# Altium PCB PCB_Hall_15mm_3_0.PcbDoc
Units mm, origin at the board's own origin, x right, y up, seen from the top; angles counter-clockwise.
Board outline 29.25 x 60.24 mm, 4 copper layers (Top Layer, Signal Layer 1, Signal Layer 2, Bottom Layer), stack 0.778 mm thick; 11 components, 15 nets, 67 pads, 21 vias.
Unrouted connection lines stored in the file: 13.
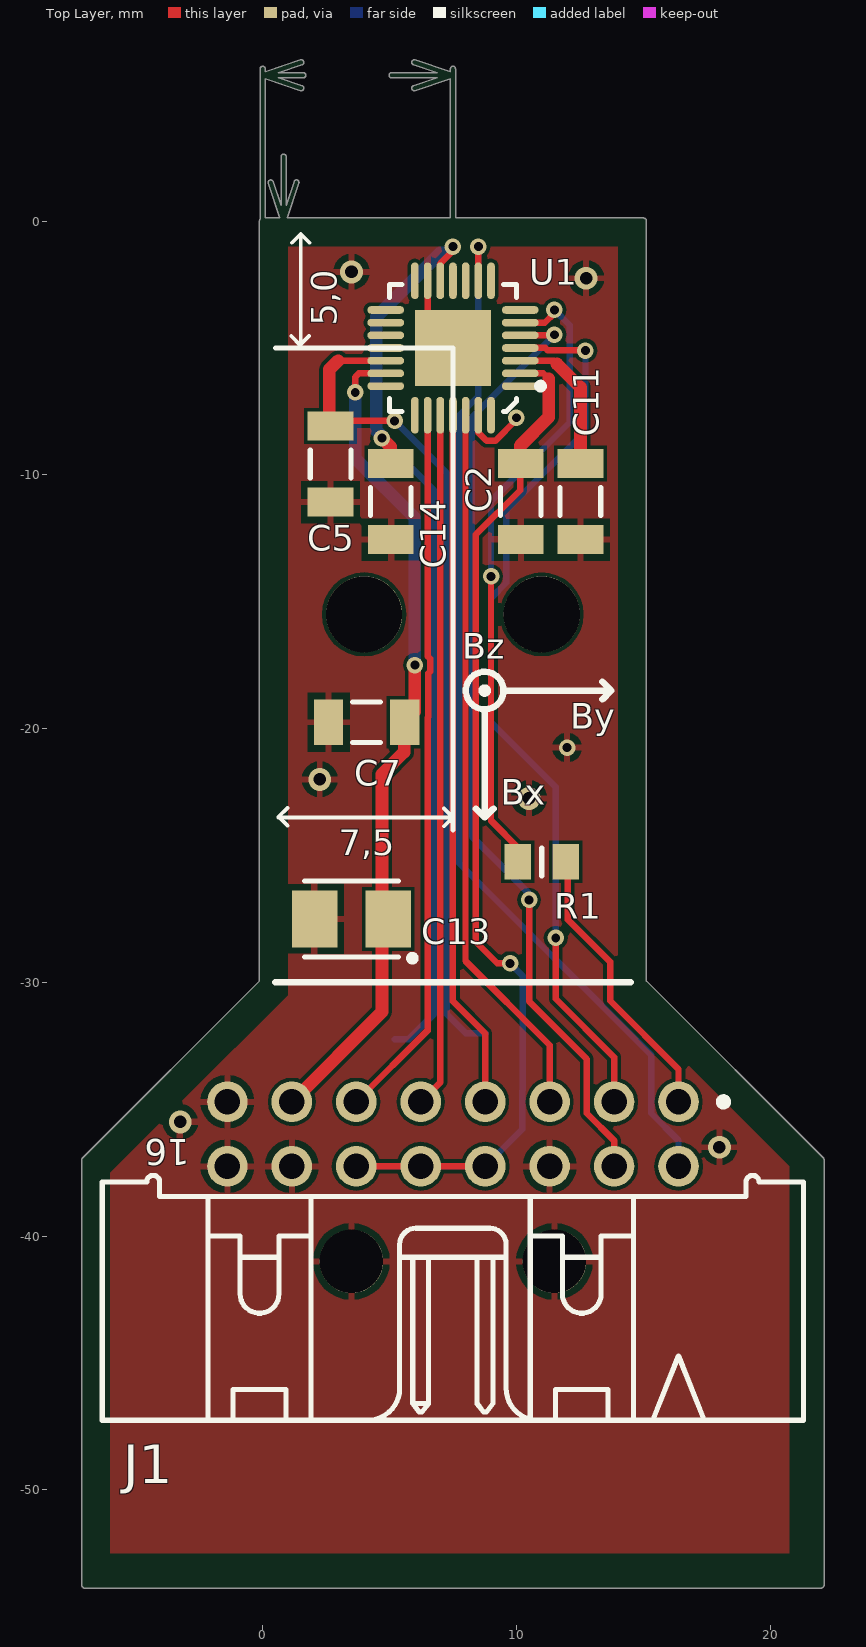
[diagram p0: Top Layer view]
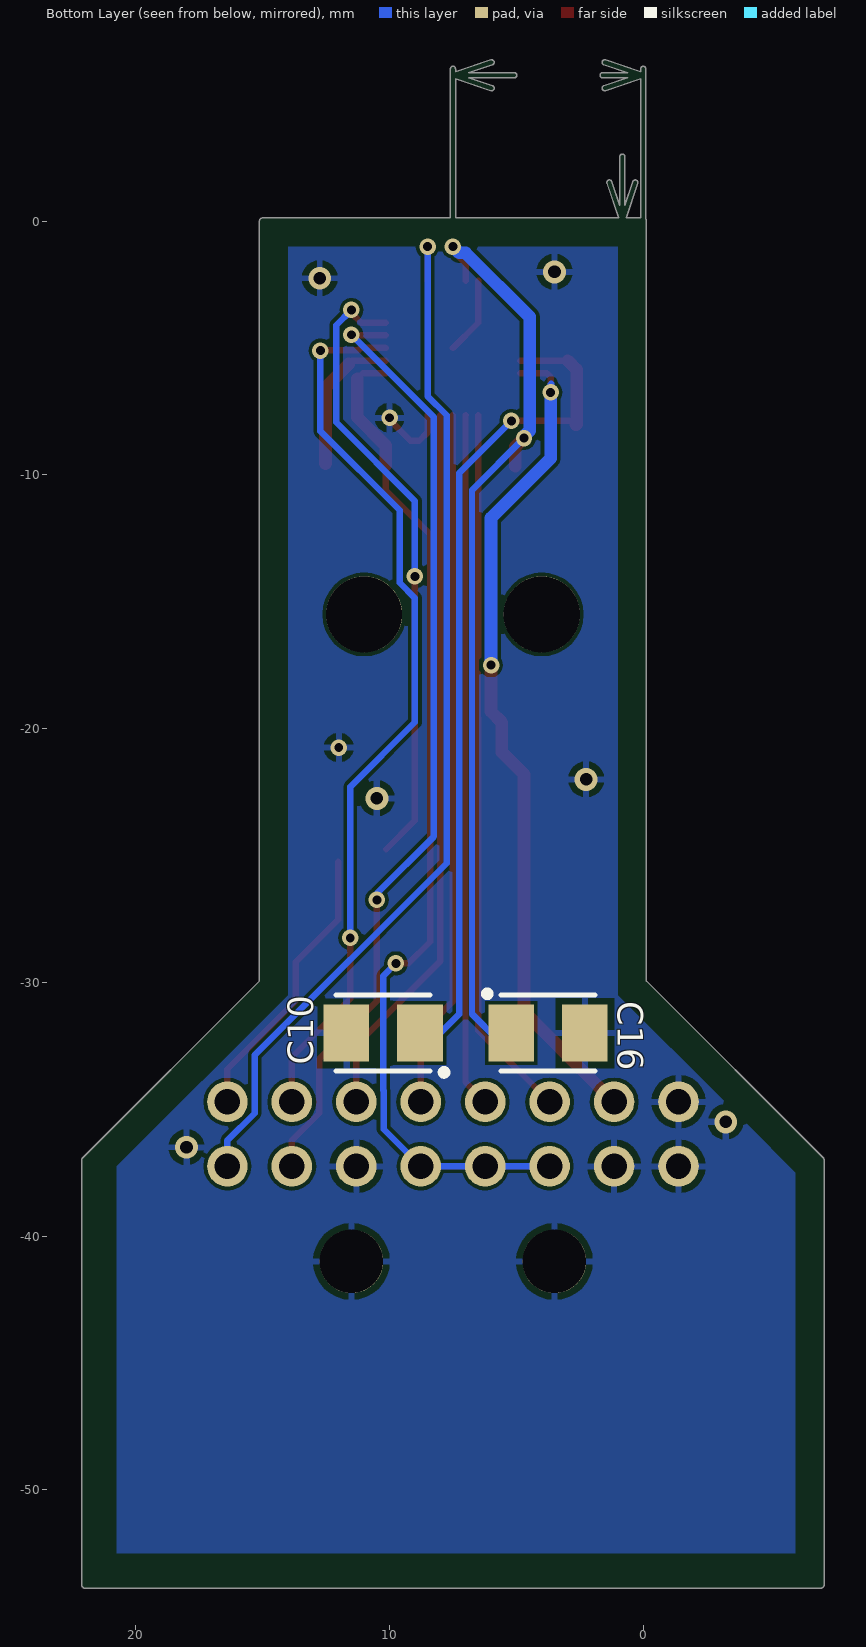
[diagram p1: Bottom Layer view, seen from below]
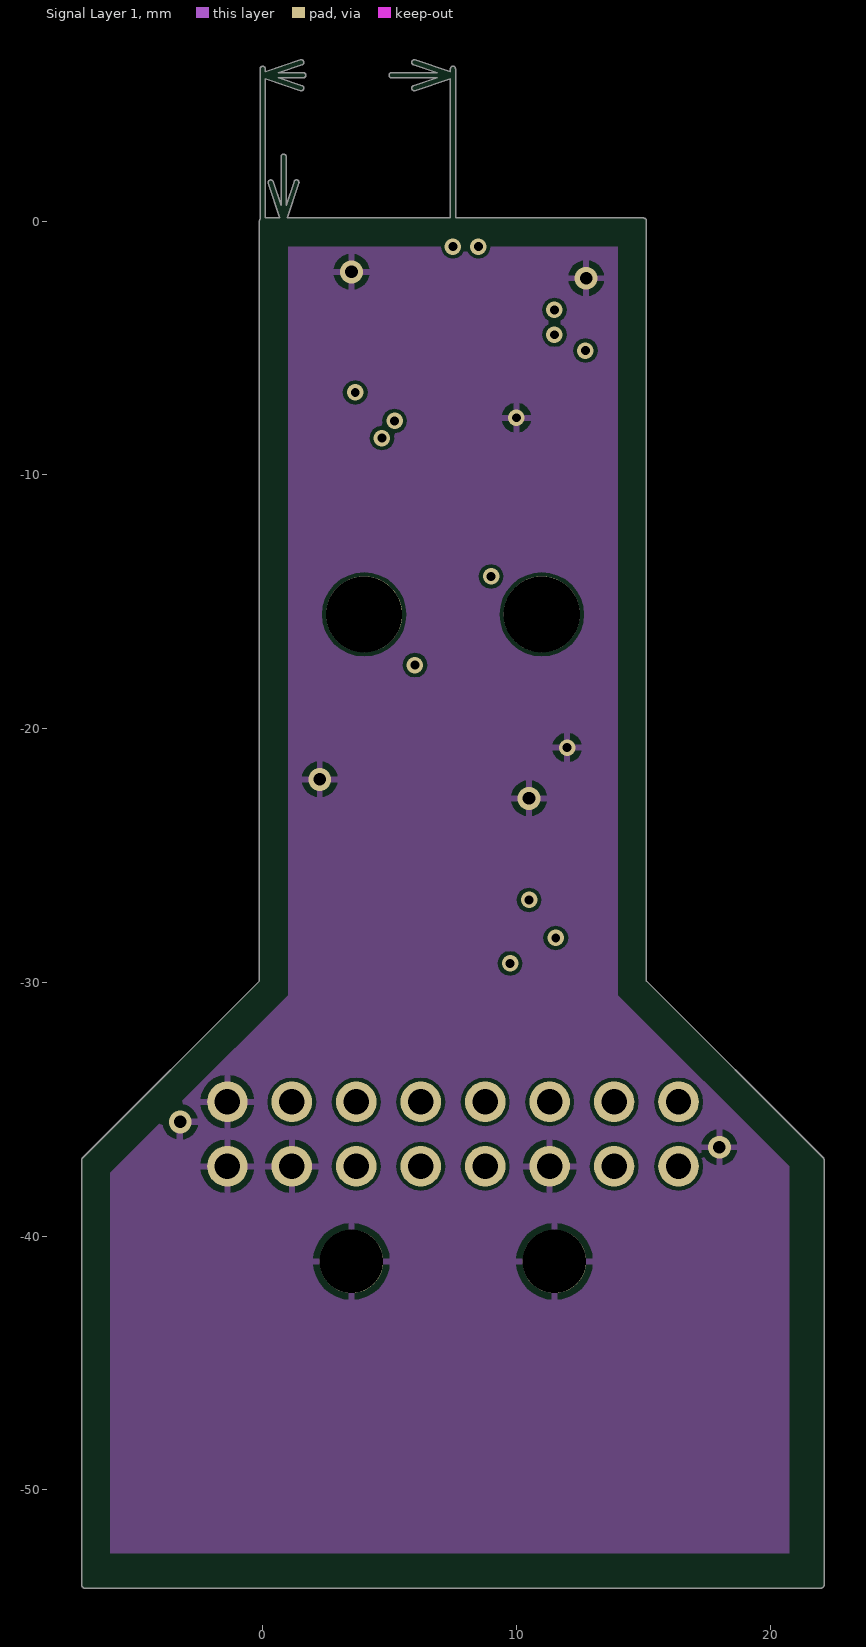
[diagram p2: Signal Layer 1]
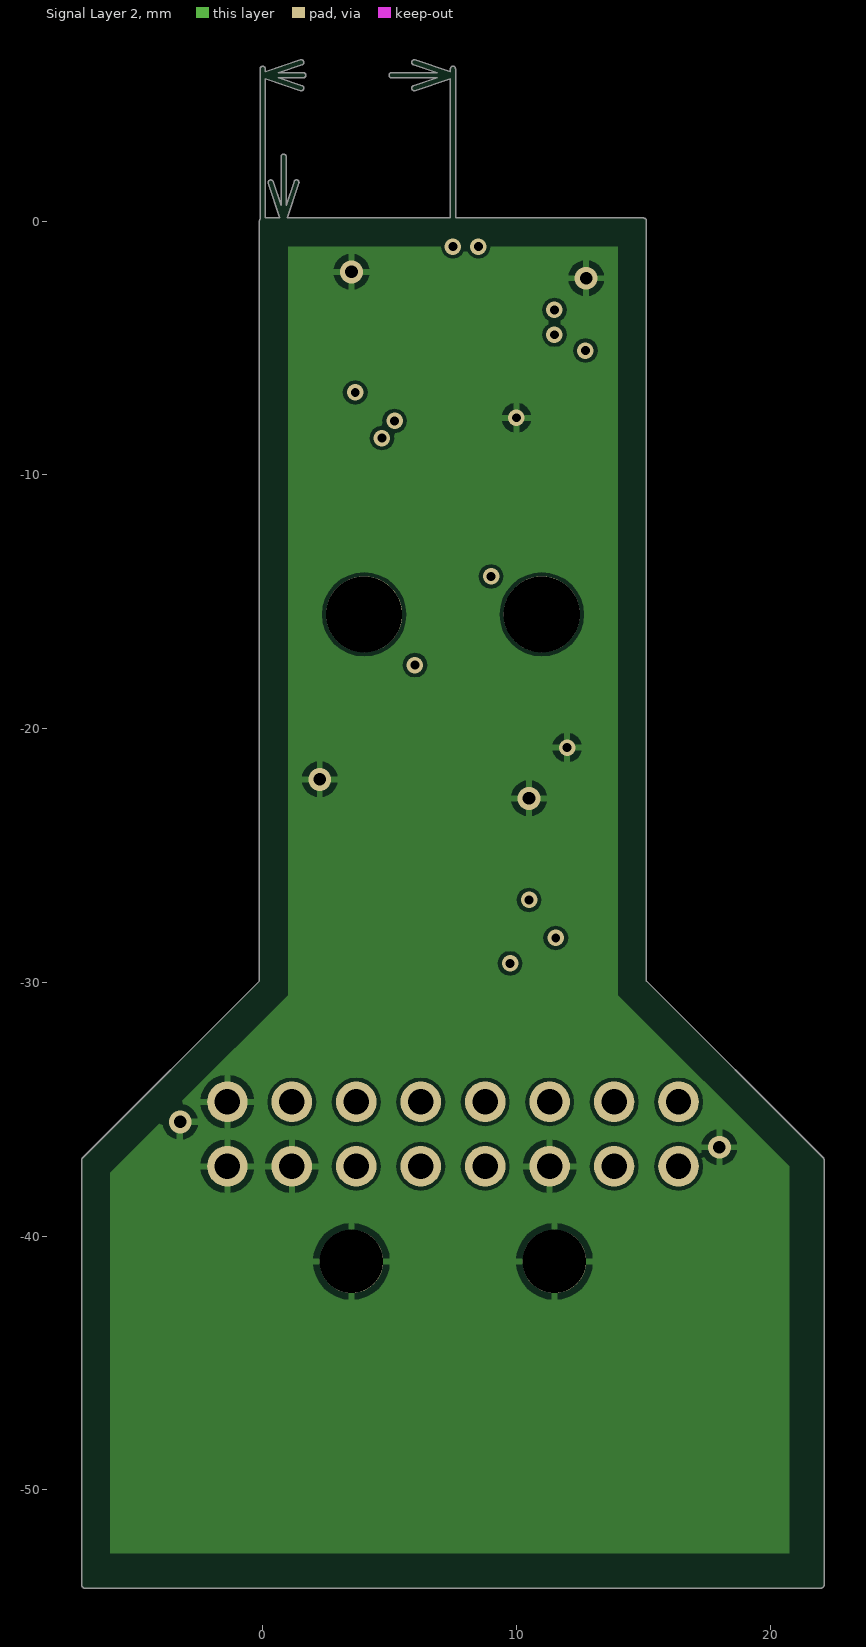
[diagram p3: Signal Layer 2]
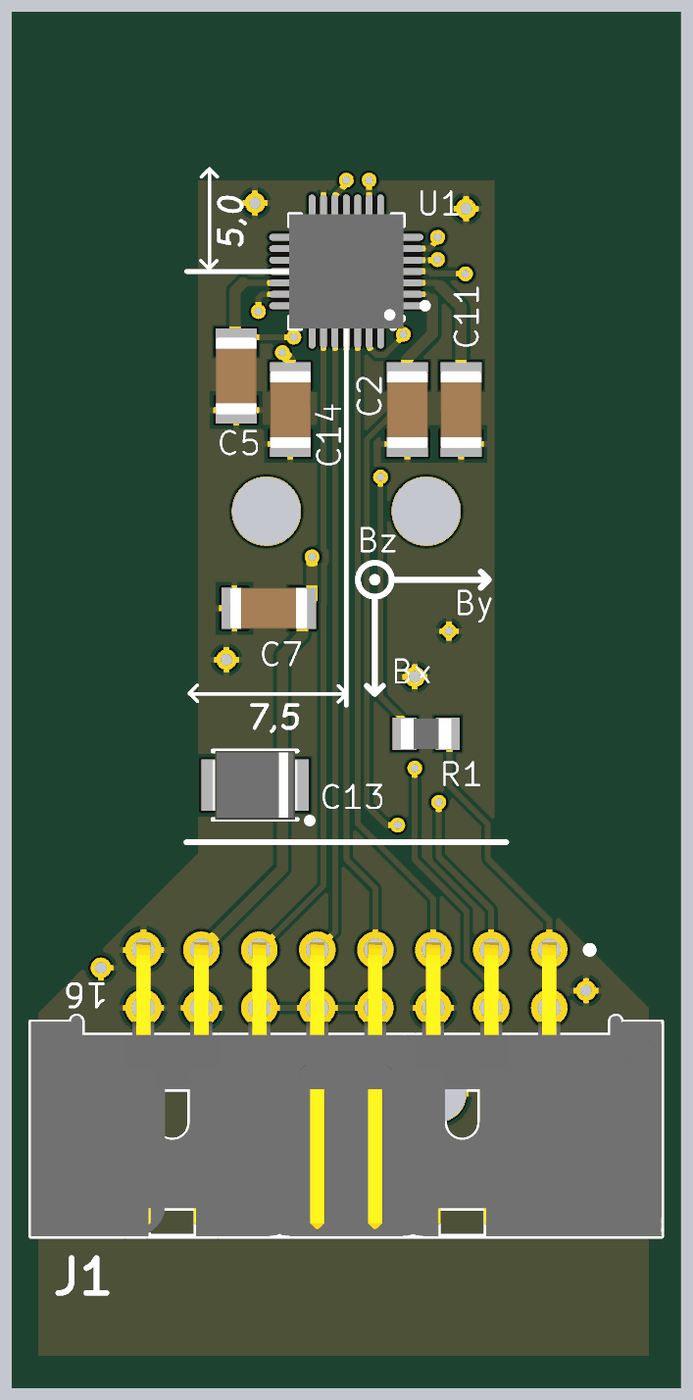
[diagram p4: 3D render of the assembled board from above, using the file's embedded part models]

## Layer stack, top to bottom
Top Solder: solder mask 0.0102, Solder Resist, Dk 3.5
Top Layer: signal copper 0.0356
Dielectric 1: core 0.254, FR-4, Dk 4.2
Signal Layer 1: signal copper 0.036
Dielectric 3: prepreg 0.127, Dk 4.2
Signal Layer 2: signal copper 0.036
Dielectric 2: core 0.254, Dk 4.2
Bottom Layer: signal copper 0.0356
Bottom Solder: solder mask 0.0102, Solder Resist, Dk 3.5

## Board outline
-7.127,-37 cw(c-7,-37) -7.09,-36.909 -7.09,-36.91 -0.127,-29.947 -0.127,0 cw(c0,0) -0.1,0.078 -0.1,6.004 cw(c0,6.004) 0.1,6.004 0.1,5.889 1.492,6.353 cw(c1.524,6.258) 1.624,6.258 cw(c1.524,6.258) 1.556,6.163 0.619,5.85 1.604,5.85 cw(c1.604,5.75) 1.705,5.75 cw(c1.604,5.75) 1.604,5.65 0.619,5.65 1.556,5.337 cw(c1.524,5.242) 1.624,5.242 cw(c1.524,5.242) 1.492,5.147 0.1,5.611 0.1,0.127 0.677,0.127 0.222,1.492 cw(c0.317,1.524) 0.412,1.556 0.725,0.619 0.725,2.54 cw(c0.825,2.54) 0.925,2.54 0.925,0.619 1.238,1.556 cw(c1.333,1.524) 1.433,1.524 cw(c1.333,1.524) 1.428,1.492 0.973,0.127 7.4,0.127 7.4,5.611 6.008,5.147 cw(c5.976,5.242) 5.944,5.337 6.881,5.65 5.083,5.65 cw(c5.083,5.75) 5.083,5.85 6.881,5.85 5.944,6.163 cw(c5.976,6.258) 6.008,6.353 7.4,5.889 7.4,6.004 cw(c7.5,6.004) 7.6,6.004 7.6,0.127 15,0.127 cw(c15,0) 15.127,0 cw(c15,0) 15.127,-0.002 15.127,-29.947 22.09,-36.91 22.09,-36.909 cw(c22,-37) 22.127,-37 22.127,-53.75 cw(c22,-53.75) 22,-53.877 -7,-53.877 cw(c-7,-53.75) -7.127,-53.75

## Design rules (kind name [scope] priority, off if disabled: settings)
Clearance [All] p1: gap=0.15 ignorepadtopadclearanceinfootprint=FALSE except(0: Arc-Text Track-Text SMDPad-Text THPad-Text Via-Text Fill-Text Poly-Text Region-Text Text-Text)
HoleSize [All] p1: absolutevalues=TRUE maxlimit=20 minlimit=0.3 maxpercent=80.000 minpercent=20.000
MinimumSolderMaskSliver [All] p1 off: minsoldermaskwidth=0.254
PasteMaskExpansion [All] p1 off: expansion=0
PolygonConnect [All] p1: connectstyle=Relief reliefconductorwidth=0.254 reliefentries=4 polygonreliefangle="90 Angle" airgapwidth=0.254
RoutingCorners [All] p1: cornerstyle=45-Degree minsetback=0.5 maxsetback=2.54
RoutingTopology [InNetClass('All Nets')] p1: topology=Shortest
RoutingVias [All] p1: holewidth=0.35 width=0.55 viastyle="Through Hole" minholewidth=0.3 minwidth=0.45 maxholewidth=0.711 maxwidth=1.27
SilkToSilkClearance [All] p1 off: silktosilkclearance=0.254
SilkToSolderMaskClearance [IsPad] p1 off: minsilkscreentomaskgap=0.254 clearancetoexposedcopper=TRUE
SolderMaskExpansion [All] p1 off: expansion=0.102
UnRoutedNet [All] p1: checkbadconnections=TRUE
Width [All] p1: maxlimit=0.5 minlimit=0.15 preferedwidth=0.254 toplayer_prefwidth=0.2 midlayer1_minwidth=0.254 midlayer2_minwidth=0.254 midlayer2_maxwidth=0.254 bottomlayer_prefwidth=0.2 minimp=50.000000 maximp=50.000000 favimp=50.000000
22 further rules are at their usual default settings.

## Components (designator, comment, footprint, x,y, rotation, side; value= is the part's Value field where it differs from the comment)
C2 "0.1" CAPC3216X100N 10.175,-11.05 r90 top
C5 "0.1" CAPC3216X100N 2.675,-9.575 r270 top
C7 "0.1" CAPC3216X100N 4.1,-19.75 r180 top
C10 "=Value" CAPMP3528X120N 10.25,-32 r0 bottom
C11 "0.1" CAPC3216X100N 12.525,-11.05 r90 top
C13 "=Value" CAPMP3528X120N 3.5,-27.5 r180 top
C14 "0.1" CAPC3216X100N 5.05,-11.05 r90 top
C16 "=Value" CAPMP3528X120N 3.75,-32 r180 bottom
J1 "=Family" 3M_N2516-5002RB 7.5,-35.98 r180 top
R1 "1k" RESC2012X70N 11,-25.25 r0 top
U1 "Hall sensor" QFN50P500X500X100-29N-S325 7.5,-5 r180 top

## Footprints (in the part's own frame and the unit in brackets; to place one, negate y for a bottom-side part, rotate by r counter-clockwise, add the part's x,y. Pads: shape width x height; smd on the part's side, far side on the other; paste and mask are expansions set on the pad)
3M_N2516-5002RB [mm] "16 Contacts - Right Angle .100\" x .100\" Low Profile Four-Wall Header"
  round 1.6 hole 1: 1(-8.89,-1.27) 2(-8.89,1.27) 3(-6.35,-1.27) 4(-6.35,1.27) 5(-3.81,-1.27) 6(-3.81,1.27) 7(-1.27,-1.27) 8(-1.27,1.27) 9(1.27,-1.27) 10(1.27,1.27) 11(3.81,-1.27) 12(3.81,1.27) 13(6.35,-1.27) 14(6.35,1.27) 15(8.89,-1.27) 16(8.89,1.27)
  silkscreen extent -13.81,-1.42 13.82,11.28, body extent -13.81,-1.59 13.82,11.27, height 8.64
CAPC3216X100N [mm] "Chip Capacitor, Body 3.2x1.6mm, IPC Medium Density"
  rect 1.15x1.8 smd: 1(-1.5,0) 2(1.5,0)
  silkscreen extent -0.55,-0.8 0.55,0.8, body extent -1.7,-0.9 1.7,0.9, height 0.94
CAPMP3528X120N [mm] "Capacitor, Polarized, Molded  Body 3.5x2.8mm, IPC Medium Density"
  rect 1.8x2.25 smd: 1(-1.45,0) 2(1.45,0)
  silkscreen extent -2.52,-1.5 1.85,1.67, body extent -1.85,-1.5 1.85,1.5, height 1.2
QFN50P500X500X100-29N-S325 [mm] "QFN, 0.50mm Pitch, Square; 28 pin, 5.00mm L X 5.00mm W X 1.00mm H body (w/thermal tab 3.25 X 3.25mm),  IPC Medium Density"
  oval 1.45x0.3 smd: 1(-2.65,1.5) 2(-2.65,1) 3(-2.65,0.5) 4(-2.65,0) 5(-2.65,-0.5) 6(-2.65,-1) 7(-2.65,-1.5) 15(2.65,-1.5) 16(2.65,-1) 17(2.65,-0.5) 18(2.65,0) 19(2.65,0.5) 20(2.65,1) 21(2.65,1.5)
  oval 0.3x1.45 smd: 8(-1.5,-2.65) 9(-1,-2.65) 10(-0.5,-2.65) 11(0,-2.65) 12(0.5,-2.65) 13(1,-2.65) 14(1.5,-2.65) 22(1.5,2.65) 23(1,2.65) 24(0.5,2.65) 25(0,2.65) 26(-0.5,2.65) 27(-1,2.65) 28(-1.5,2.65)
  rect 3x3 smd: 29(0,0)
  silkscreen extent -3.58,-2.5 2.5,2.5, body extent -2.5,-2.5 2.5,2.5, height 1
RESC2012X70N [mm] "Chip Resistor, EIA 0805, Metric 2012, Body 2.0x1.25mm, IPC Medium Density"
  rect 1.05x1.4 smd: 1(-0.95,0) 2(0.95,0)
  silkscreen extent 0,-0.55 0,0.55, body extent -1.1,-0.67 1.1,0.68, height 0.7

## Part data
C2 C5 C7 C11 C14: library part "Capacitor1206 - non polarized", "Non-polarised1206 capacitor", Dielectric type=X5R, SMD Solders=2, SolderOption=0, THD Solders=0, Vendor=any
C10 C13 C16: library part "Capacitor - polarized", "Polarised capacitor", SMD Solders=2, SolderOption=0, THD Solders=0
J1: library part "Connector 16", "Connector 16", SMD Solders=0, Solder Option=0, THD Solders=16
R1: library part "Resistor - 5%", "Resistor - 5%", Tolerance=5%, SMD Solders=2, SolderOption=0, THD Solders=0, TK=1000ppmC^(-1), Vendor=any
U1: "SENM3Dx Vertical Hall Sensor"

## Free pads (board coordinates)
  round 3 hole 3: 1(4,-15.5) 2(11,-15.5)
  round 2.5 hole 2.5: 3(3.5,-41) 4(11.5,-41)

## Via types
v1: diameter 0.65, hole 0.35, Top Layer to Bottom Layer, 15 vias
v2: diameter 0.9, hole 0.5, Top Layer to Bottom Layer, 6 vias

## Nets (pads, with @x,y where several pads share a name; then routed paths per layer and width w, separated by ;. In a path a pad name is that pad's centre, name@x,y a point inside that pad or via, vN(x,y) a via of type N, cw(c..) or ccw(c..) an arc to the next point about the centre after c; other vN are vias at no path point)
"5V Hall": C7.1 C13.1 J1.13 U1.20 | length 33.2
  Top Layer w0.254: v1(3.65,-6.75) 3.65,-6.145 3.795,-6 U1.20
  Top Layer w0.5: J1.13 4.7,-31.16 4.7,-27.5 4.7,-21.8 5.575,-20.925 5.575,-19.75 6,-19.325 v1(6,-17.5)
  Bottom Layer w0.254: 3.625,-6.4 3.65,-6.425 v1(3.65,-6.75)
  Bottom Layer w0.5: v1(3.65,-6.75) 3.65,-9.35 6,-11.7 v1(6,-17.5)
CS1: J1.2 U1.9 | length 41.5
  Top Layer w0.254: U1.9 8.5,-1.5 ; 8.5,-1.45 v1(8.5,-1)
  Bottom Layer w0.254: v1@8.5,-0.9 v1(8.5,-1) 8.5,-6.904 7.75,-7.654 7.75,-25.301 15.313,-32.864 15.313,-35.156 16.39,-36.233 J1.2
GND: C2.1 C5.2 C7.2 C10.2 C11.1 C13.2 C14.1 C16.2 J1.6 J1.14 J1.15 J1.16 pad.3 pad.4 U1.13 U1.27 U1.29 | length 5.8
  Top Layer w0.254: U1.13 6.5,-4 U1.29 ; U1.27 8.5,-8.329 8.823,-8.652 9.177,-8.652 10,-7.829 v1(10,-7.75)
  other v1: 12,-20.75
  other v2: 18,-36.5 -3.25,-35.5 10.5,-22.75 2.25,-22 12.75,-2.25 3.5,-2
MCLK: J1.3 U1.4 | length 35.8
  Top Layer w0.254: U1.4 10.162,-4.988 11.137,-4.988 11.245,-5.096 12.717,-5.096 v1(12.723,-5.102) v1@12.748,-5.102 ; v1(11.55,-28.25) 11.55,-30.65 13.85,-32.95 J1.3
  Bottom Layer w0.254: v1(11.55,-28.25) 11.55,-22.3 9,-19.75 9,-14.851 9.602,-14.249 9.602,-11.398 12.723,-8.277 v1(12.723,-5.102)
MISO: R1.1 U1.6 | length 24.9
  Top Layer w0.254: v1(9,-14) 9,-23.625 R1.1@10.125,-24.75 ; U1.6 11.117,-4 11.5,-3.617 v1(11.5,-3.5)
  Bottom Layer w0.254: v1(9,-14) 9,-11.029 12.103,-7.927 12.103,-4.103 v1(11.5,-3.5)
MOSI: J1.4 U1.5 | length 37.8
  Top Layer w0.254: U1.5 11.476,-4.5 v1(11.501,-4.475) ; v1(10.5,-26.75) 10.5,-30.75 12.773,-33.023 12.773,-35.156 13.85,-36.233 J1.4
  Bottom Layer w0.254: v1(10.5,-26.75) 10.5,-26.5 8.25,-24.25 8.25,-7.726 v1(11.501,-4.475)
NetC5_1: C5.1 C10.1 U1.19 | length 33.5
  Top Layer w0.254: C5.1 2.875,-7.875 v1(5.2,-7.875) ; 2.973,-5.5 U1.19
  Top Layer w0.5: C5.1@2.65,-8.025 2.625,-8 2.625,-5.848 2.973,-5.5
  Bottom Layer w0.254: C10.1 8,-32 7.25,-31.25 7.25,-9.925 v1@5.35,-8.025 ; v1@5.35,-8.025 v1(5.2,-7.875) 5.2,-7.85 5.35,-8 v1@5.35,-8.025
NetC11_2: C11.2 U1.3 | length 5.8
  Top Layer w0.2: 11.475,-5.5 11.604,-5.629
  Top Layer w0.254: U1.3 11.475,-5.5
  Top Layer w0.5: 11.604,-5.629 12.525,-6.55 C11.2
NetC14_2: C14.2 C16.1 U1.12 | length 37.5
  Top Layer w0.254: v1@4.7,-8.675 v1(4.7,-8.55) ; U1.12 7,-1.671 7.5,-1.171 v1(7.5,-1)
  Top Layer w0.5: v1(4.7,-8.55) 5.05,-8.9 C14.2 C14.2@5.05,-9.65
  Bottom Layer w0.254: v1(4.7,-8.55) 6.75,-10.6 6.75,-31.25 5.75,-32.25 C16.1@5.2,-32.25
  Bottom Layer w0.5: v1(4.7,-8.55) 4.7,-8.476 4.475,-8.25 4.475,-3.775 7,-1.25 7.25,-1.25 v1(7.5,-1)
NetJ1_1: J1.1 R1.2 | length 11.3
  Top Layer w0.254: R1.2@12.025,-25.25 12.025,-27.525 13.695,-29.195 13.695,-30.73 16.39,-33.425 J1.1
V1temp: J1.5 U1.26 | length 28.4
  Top Layer w0.254: U1.26 7.994,-7.656 7.994,-29.159 11.31,-32.475 J1.5
V1x: J1.9 U1.24 | length 27.4
  Top Layer w0.254: J1.9 7.006,-33.934 7.006,-7.656 U1.24
V1y: J1.11 U1.23 | length 28.3
  Top Layer w0.254: J1.11 6.5,-31.9 6.5,-19.57 6.527,-19.543 6.527,-17.824 6.602,-17.749 6.602,-17.251 6.5,-17.149 U1.23
V1z: J1.7 U1.25 | length 27.6
  Top Layer w0.254: U1.25 7.5,-30.73 7.5,-30.75 8.77,-32.02 J1.7
Vref1: C2.2 J1.8 J1.10 J1.12 U1.2 | length 45.3
  Top Layer w0.254: J1.12 J1.10 J1.8 ; v1(9.75,-29.25) 9.25,-29.25 8.398,-28.398 8.398,-12.352 10.15,-10.6 C2.2@10.15,-9.625 ; U1.2 11.056,-6 11.275,-6.219
  Top Layer w0.5: C2.2@10.15,-9.625 10.15,-8.85 11.275,-7.725 11.275,-6.219
  Bottom Layer w0.254: J1.12 J1.10 J1.8 10.233,-35.787 10.233,-34.264 10.25,-34.247 10.25,-29.75 v1(9.75,-29.25)
pads on no net: U1.1 U1.7 U1.8 U1.10 U1.11 U1.14 U1.15 U1.16 U1.17 U1.18 U1.21 U1.22 U1.28

## Polygon pours and split planes (outlines as drawn)
GND on Bottom Layer "Bottom Layer-GND" (solid, pour order 14): 1,-1 14,-1 14,-30.5 20.75,-37.25 20.75,-52.5 -6,-52.5 -6,-37.5 1,-30.5
GND on Bottom Layer "Bottom Layer-GND 1" (solid, pour order 12): 1,-1 14,-1 14,-30.5 20.75,-37.25 20.75,-52.5 -6,-52.5 -6,-37.5 1,-30.5
GND on Signal Layer 1 "Signal Layer 1-GND" (solid, pour order 18): 1,-1 14,-1 14,-30.5 20.75,-37.25 20.75,-52.5 -6,-52.5 -6,-37.5 1,-30.5
GND on Signal Layer 2 "Signal Layer 2-GND" (solid, pour order 20): 1,-1 14,-1 14,-30.5 20.75,-37.25 20.75,-52.5 -6,-52.5 -6,-37.5 1,-30.5
GND on Top Layer "Top Layer-GND" (solid, pour order 16): 1,-1 14,-1 14,-30.5 20.75,-37.25 20.75,-52.5 -6,-52.5 -6,-37.5 1,-30.5

## Silkscreen, mask and mechanical layers (free items; w line width, h text height)
Top Overlay:
  circle w0.254: c8.75,-18.5 r0.12
  circle w0.254: c8.75,-18.5 r0.74
  lines w0.15: 0.625,-23.5 7.5,-23.5 ; 0.975,-23.825 0.625,-23.475 0.975,-23.125 ; 1.125,-4.525 1.475,-4.875 ; 1.15,-0.85 1.5,-0.5 ; 1.825,-4.525 1.475,-4.875 ; 1.85,-0.85 1.5,-0.5 ; 7.15,-23.85 7.5,-23.5 ; 7.15,-23.15 7.5,-23.5 ; 9.5,-18.5 11.275,-18.5 ; 1.475,-4.875 1.5,-4.875 1.5,-0.5
  lines w0.2: 0.5,-5 7.5,-5 7.5,-24
  lines w0.254: 0.5,-30 14.5,-30 ; 8.4,-23.15 8.75,-23.5 ; 8.75,-19.25 8.75,-23.5 ; 9.1,-23.15 8.75,-23.5 ; 9.49,-18.5 13.74,-18.5 ; 13.39,-18.85 13.74,-18.5 ; 13.39,-18.15 13.74,-18.5
  text "5,0" at 2.925,-4.125 h1 r90
  text "Bz" at 7.875,-17.25 h1
  text "By" at 12.125,-20 h1
  text "Bx" at 9.375,-23 h1
  text "7,5" at 3,-25 h1
Mechanical 5:
  lines w0.254: 15,0 15,-30 22,-37 22,-53.75 -7,-53.75 -7,-37 0,-30 0,0 15,0 ; 15,0 15,0 ; 15,0 15,0

## Dimensions
7.5,-5 to 15,0 on Mechanical 5
7.5,-5 to 0,0 on Mechanical 5

## Text inside footprints (layer, text, board x,y; h text height)
J1: Top Overlay "16" at -2.875,-36.186 h1.02 r180; Mechanical 14 "16" at -2.875,-36.186 h1.02 r180